# EAGLE board uAMP_v1.1 (EAGLE 4.16)
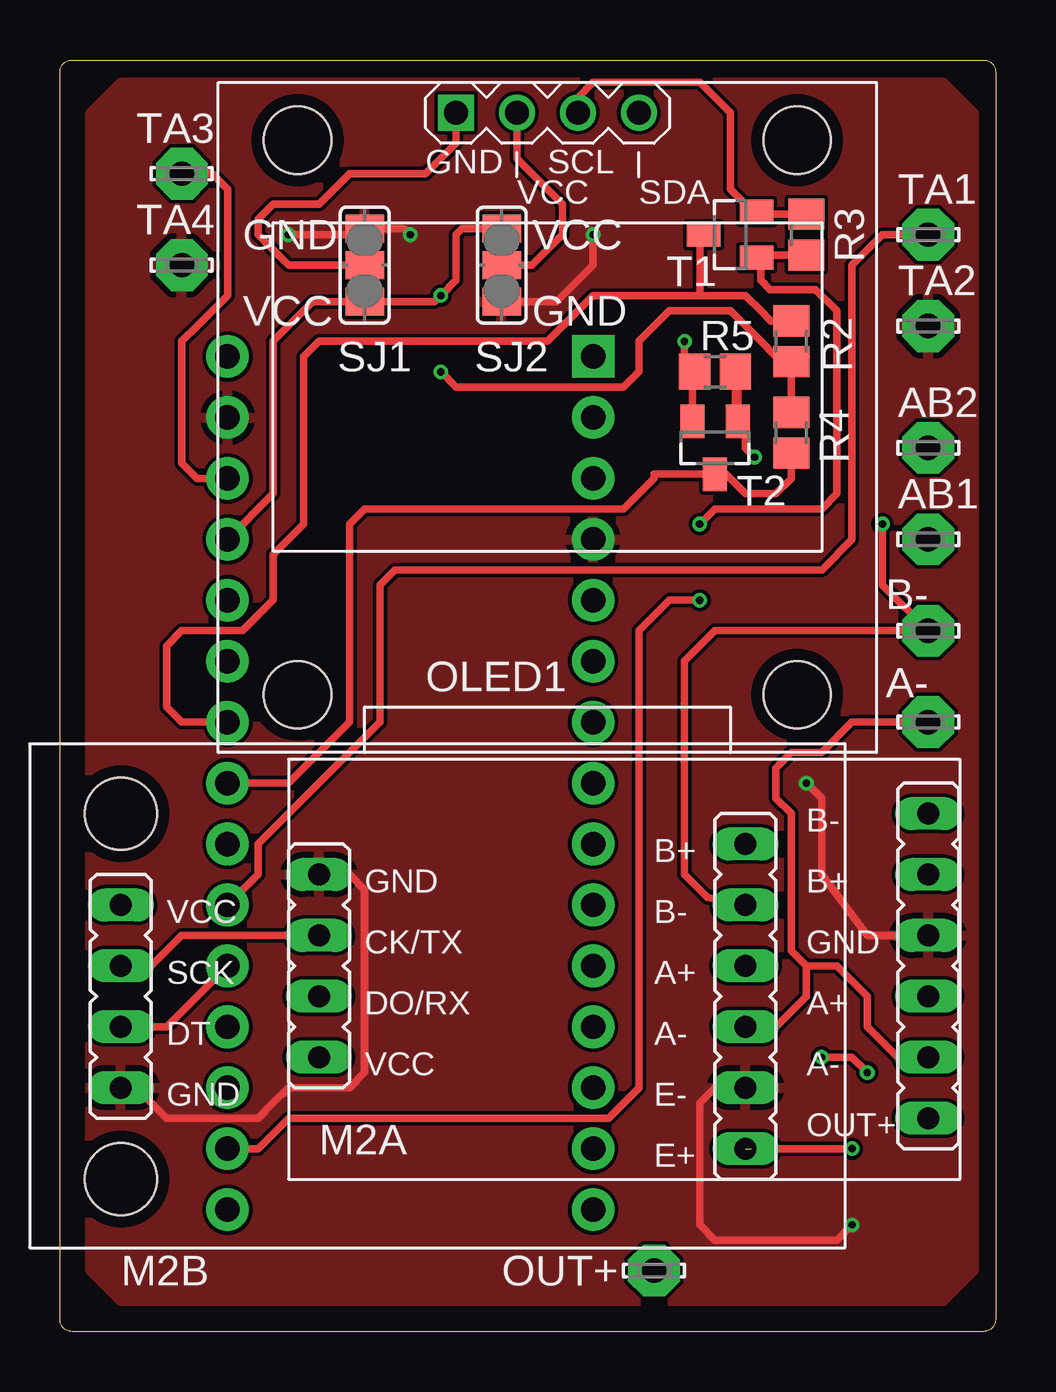
[diagram p0: board, top side]
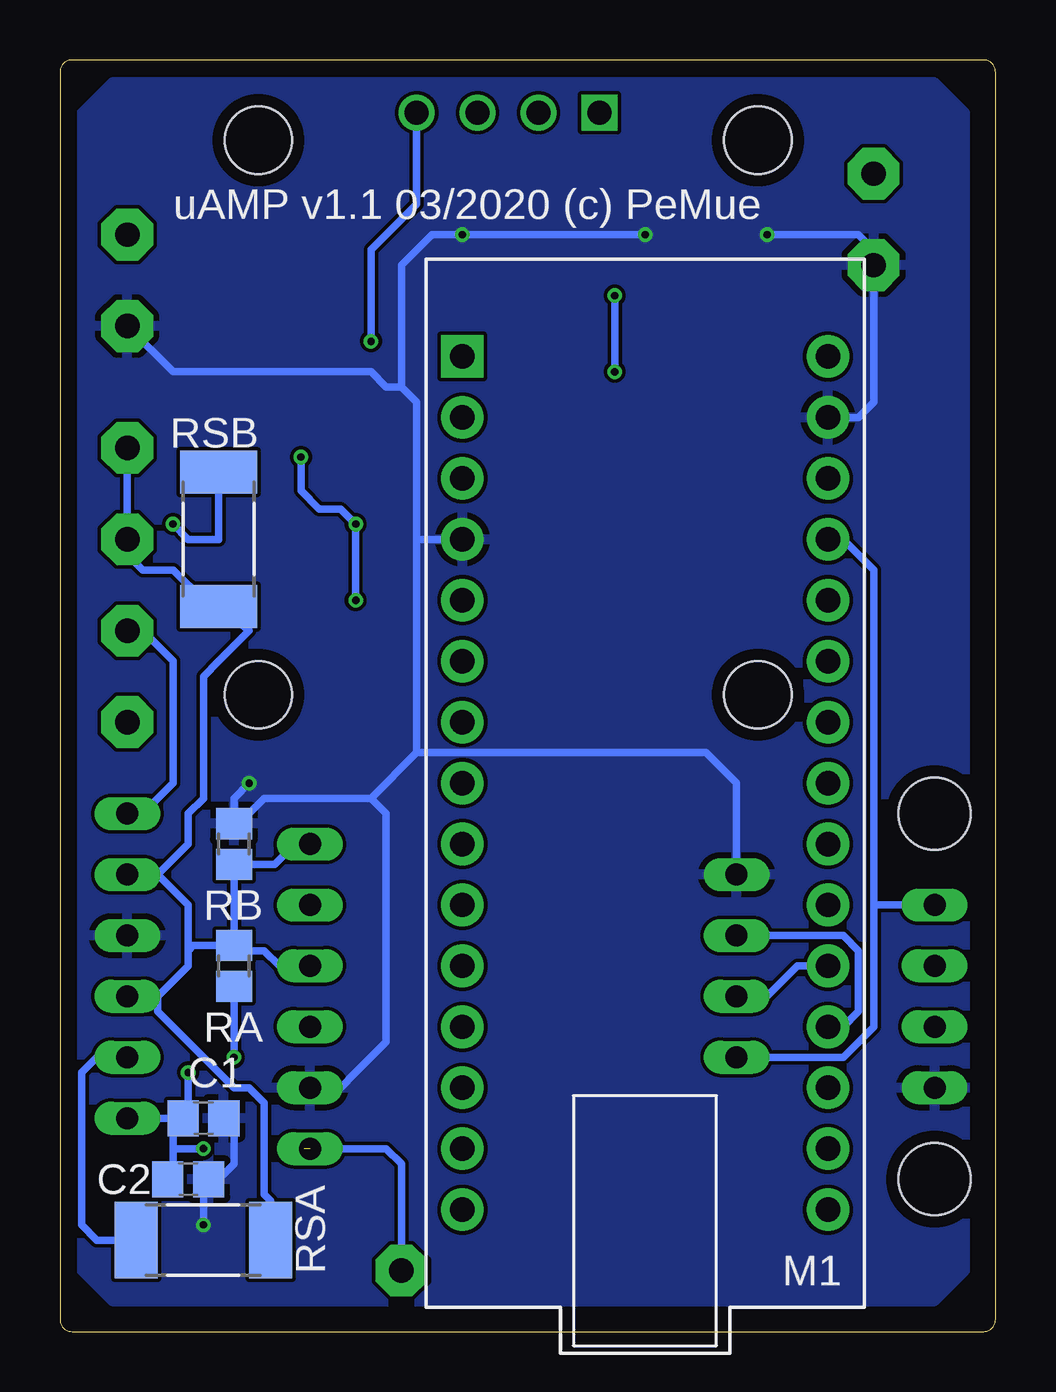
[diagram p1: board, bottom side, seen from below]

Size 39 x 53 mm. Coordinates in mm from the lower left corner, seen from the top.
Outline: 0,52.5 arc-90 0.5,53 38.5,53 arc-90 39,52.5 39,0.5 arc-90 38.5,0 0.5,0 arc-90 0,0.5 0,52.5
Copper layers (1*16): Top 0.035mm / dielectric 1.6mm / Bottom 0.035mm
Design rules "Elecrow_2-layer": minimum track width 6mil, minimum drill 12mil, track to track 6mil, track to pad 6mil, pad to pad 6mil, via to via 8mil, smd to smd 0mil, copper to edge 20mil, drill to drill 10mil, minimum pad ring 6mil, minimum via ring 6mil, stop-mask expansion 0mil, vias tented up to drill 100mil, thermal gap 10mil

## Footprints (pad centres in the part's own frame; a part is rotated, then mirrored left to right if it is on the bottom)
LSP10 = drill 1.016 pad 2.159 octagon: MP 0,0
C0805 = smd 1.3 x 1.5: 1 -0.85,0; 2 0.85,0
ARDUINO_NANO1 = drill 1.016 pad 1.778 round: 3V3 15.24,-35.56; +5V 15.24,-10.16; A0 15.24,-30.48; A1 15.24,-27.94; A2 15.24,-25.4; A3 15.24,-22.86; A4 15.24,-20.32; A5 15.24,-17.78; A6 15.24,-15.24; A7 15.24,-12.7; AREF 15.24,-33.02; D0/RX 0,-5.08; D2 0,-12.7; D3 0,-15.24; D4 0,-17.78; D5 0,-20.32; D6 0,-22.86; D7 0,-25.4; D8 0,-27.94; D9 0,-30.48; D10 0,-33.02; D11 0,-35.56; D12 0,-38.1; D13 15.24,-38.1; GND@0 0,-10.16; GND@1 15.24,-5.08; RESET@0 0,-7.62; RESET@1 15.24,-7.62; VIN 15.24,-2.54 | drill 1.016 pad 1.778 square: D1/TX 0,-2.54
HX711_RED = drill 0.914 long: A+ 26.67,7.62; A- 26.67,5.08; B+ 26.67,12.7; B- 26.67,15.24; CK/TX 1.27,10.16; DO/RX 1.27,7.62; GND@1 1.27,12.7; GND@2 26.67,10.16; OUT+ 26.67,2.54; VCC 1.27,5.08
HY711_GREEN = drill 0.914 long: A+ 29.845,11.43; A- 29.845,8.89; B+ 29.845,16.51; B- 29.845,13.97; DT 3.81,8.89; E+ 29.845,3.81; E- 29.845,6.35; GND 3.81,6.35; SCK 3.81,11.43; VCC 3.81,13.97 | hole 3: 3.81,17.78; 3.81,2.54
OLED_128X64_I2C = drill 1 square: 1 -3.81,12.7 | drill 1 round: 2 -1.27,12.7; 3 1.27,12.7; 4 3.81,12.7 | hole 2.8: -10.414,11.557; 10.414,11.557; 10.414,-11.557; -10.414,-11.557
R0805 = smd 1.3 x 1.5: 1 -0.85,0; 2 0.85,0
R2512 = smd 1.8 x 3.2: 1 -2.8,0; 2 2.8,0
SJ_2 = smd 1.168 x 1.6: 1 -1.524,0; 2 0,0; 3 1.524,0
SOT23 = smd 1 x 1.4: 1 -0.95,-1.1; 2 0.95,-1.1; 3 0,1.1

## Placement (x,y rotation side)
A-  LSP10  [LSP10]  36.2,25.4 0 top
AB1  LSP10  [LSP10]  36.2,33.02 0 top
AB2  LSP10  [LSP10]  36.2,36.83 0 top
B-  LSP10  [LSP10]  36.2,29.21 0 top
C1  100n  [C0805]  33.02,8.89 0 bottom
C2  10µ  [C0805]  33.66,6.35 0 bottom
M1  ARDUINO_NANO1  [ARDUINO_NANO1]  22.23,43.18 0 bottom
M2A  HX711_RED  [HX711_RED]  9.53,6.35 0 top
M2B  HX711_GREEN  [HY711_GREEN]  -1.27,3.81 0 top
OLED1  OLED_128X64_I2C  [OLED_128X64_I2C]  20.32,38.1 0 top
OUT+  LSP10  [LSP10]  24.77,2.54 0 top
R2  10k  [R0805]  30.48,41.27 270 top
R3  10k  [R0805]  31.11,45.72 270 top
R4  10k  [R0805]  30.48,37.47 90 top
R5  10k  [R0805]  27.3,40.01 0 top
RA  1k  [R0805]  31.75,15.24 270 bottom
RB  1k  [R0805]  31.75,20.32 270 bottom
RSA  1  [R2512]  33.02,3.81 180 bottom
RSB  1  [R2512]  32.38,33.02 90 bottom
SJ1  [SJ_2]  12.7,44.45 90 top
SJ2  [SJ_2]  18.41,44.45 90 top
T1  2N7002K  [SOT23]  27.94,45.72 90 top
T2  2N7002K  [SOT23]  27.3,36.83 180 top
TA1  LSP10  [LSP10]  36.2,45.72 0 top
TA2  LSP10  [LSP10]  36.2,41.91 0 top
TA3  LSP10  [LSP10]  5.08,48.26 0 top
TA4  LSP10  [LSP10]  5.08,44.45 0 top

## Library data of the parts
A- AB1 AB2 B- OUT+ TA1-TA4 = solpad
C1 C2 R2-R5 RA RB RSA RSB = rcl
M1 = arduino
M2A M2B = sensor
OLED1 = opto
SJ1 SJ2 = jumper
T1 T2 = electronics

## Nets
+3V3: M1.3V3 R3.2 R5.2 T1.1 T2.1
+5V: M1.+5V M2A.VCC M2B.VCC R2.2 R4.2 SJ1.1 SJ2.3
A-: A-.MP M2A.A- M2B.A- RSA.2
AB+: AB1.MP AB2.MP M2A.A+ M2A.B+ M2B.A+ M2B.B+ RA.1 RB.2 RSA.1 RSB.1
B-: B-.MP M2A.B- M2B.B- RSB.2
GND: C1.2 C2.2 M1.GND@0 M1.GND@1 M2A.GND@1 M2A.GND@2 M2B.E- M2B.GND RB.1 SJ1.3 SJ2.1 TA2.MP TA4.MP
N$1: M1.RESET@1 TA3.MP
N$3: M1.A1 M2A.DO/RX M2B.DT
N$4: M1.A0 M2A.CK/TX M2B.SCK
N$5: M1.A2 TA1.MP
OUT+: C1.1 C2.1 M2A.OUT+ M2B.E+ OUT+.MP RA.2
SCL_3: OLED1.3 R3.1 T1.2
SCL_5: M1.A5 R2.1 T1.3
SDA_3: OLED1.4 R5.1 T2.2
SDA_5: M1.A4 R4.1 T2.3
SUPPLY1: OLED1.1 SJ1.2
SUPPLY2: OLED1.2 SJ2.2

## Tracks (layer width: path | path; a pad name or v marks a point on that pad's centre or on a via)
+3V3  (via drill 0.3)
  Top 0.305: T2.1 28.25,39.69 27.94,40.01 R5.2 28.16,38.52 28.57,38.1 28.57,36.83 v28.96,36.45 | R3.2 29.43,44.87 29.21,45.09 29.04,44.91 T1.1 29.04,44.62 29.21,44.45 29.21,43.81 29.59,43.43 31.5,43.43 32.38,42.55 32.38,34.92 31.75,34.29 27.3,34.29 | 27.3,34.29 v26.67,33.66 27.3,34.29 | M1.3V3 8.26,7.62 9.53,8.89 22.86,8.89 24.13,10.16 24.13,29.21 25.4,30.48 v26.67,30.48
  Bottom 0.305: v26.67,30.48 v26.67,33.66 27.3,34.29 27.94,34.29 | v28.96,36.45 28.96,35.18 28.96,35.05 28.19,34.29 27.94,34.29 | 27.94,34.29 28.07,34.29
+5V  (via drill 0.3)
  Top 0.305: M1.+5V 8.89,34.92 8.89,41.27 10.54,42.93 SJ1.1 15.62,42.93 v15.88,43.18 | SJ2.3 16.76,45.97 16.51,45.72 16.51,43.81 | v15.88,43.18 16.51,43.81 | 30.48,38.1 R4.2 30.48,40.01 30.48,40.64 | 31.11,40.64 R2.2 30.48,40.64 | 30.48,40.64 29.84,40.64 29.21,41.27 27.94,42.55 25.4,42.55 24.13,41.27 24.13,40.01 23.5,39.37 16.51,39.37 v15.88,40.01 | v15.88,43.18 16.51,43.81
  Bottom 0.305: M2A.VCC 6.35,11.43 5.08,12.7 5.08,17.78 | 5.08,17.78 5.08,31.75 6.35,33.02 M1.+5V | v15.88,40.01 15.88,42.55 v15.88,43.18 | 5.08,17.78 M2B.VCC
A-
  Top 0.305: A-.MP 33.66,25.4 33.02,25.4 31.75,24.13 30.48,24.13 29.84,23.5 29.84,22.23 30.48,21.59 30.48,15.88 31.11,15.24 | 31.11,15.24 32.38,15.24 33.02,14.61 33.66,13.97 33.66,12.7 34.29,12.06 34.92,11.43 M2A.A- | M2B.A- 29.84,12.7 31.11,13.97 31.11,15.24
  Bottom 0.305: M2A.A- 37.47,11.43 38.1,10.79 38.1,4.45 37.47,3.81 35.56,3.81 RSA.2
AB+
  Bottom 0.305: 34.92,13.97 35.56,13.97 M2A.A+ | 33.66,15.88 33.66,15.24 34.92,13.97 | 33.66,15.88 33.66,17.78 34.92,19.05 | 34.92,19.05 M2A.B+ | 34.92,19.05 33.66,20.32 33.66,21.59 33.02,22.23 33.02,23.5 33.02,27.3 32.38,27.94 31.11,29.21 RSB.1 32.76,30.22 33.02,30.48 34.29,31.75 35.56,31.75 36.2,32.38 AB1.MP AB2.MP | RA.1 RB.2 30.06,19.47 29.84,19.68 29.21,20.32 M2B.B+ | RA.1 33.44,16.09 33.66,15.88 | M2B.A+ 29.84,15.24 30.48,15.88 31.75,15.88 RA.1 | RSA.1 30.22,5.46 30.48,5.71 30.48,6.35 30.48,6.99 30.48,7.62 30.48,9.53 31.11,10.16 31.75,10.16 34.92,13.34 34.92,13.97
B-  (via drill 0.3)
  Top 0.305: v34.29,33.66 34.29,31.11 B-.MP 35.56,29.21 34.92,29.21 33.66,29.21 27.3,29.21 26.04,27.94 26.04,19.05 26.99,18.1 M2B.B-
  Bottom 0.305: M2A.B- 35.56,21.59 34.29,22.86 34.29,27.94 35.56,29.21 B-.MP | v34.29,33.66 33.66,33.02 32.38,33.02 RSB.2 31.11,36.2
GND  (via drill 0.3)
  Top 0.305: v31.11,22.86 31.75,22.23 31.75,19.05 33.66,16.51 M2A.GND@2 | v9.53,45.72 12.06,45.72 SJ1.3 14.35,45.97 v14.61,45.72 | SJ2.1 20.7,42.93 22.23,44.45 v22.23,45.72 | M2B.GND 2.86,10.48 4.45,8.89 7.62,8.89 8.26,8.89 8.89,9.53 9.53,10.16 12.06,10.16 12.7,10.79 12.7,18.41 12.06,19.05 M2A.GND@1 | M2B.E- 27.3,10.16 26.67,9.53 26.67,4.45 27.3,3.81 32.38,3.81 v33.02,4.45
  Bottom 0.305: 31.54,21.17 30.48,22.23 27.3,22.23 26.04,22.23 | 31.54,21.17 RB.1 31.54,21.17 | 31.54,21.17 31.96,21.17 31.75,21.59 31.75,22.23 v31.11,22.86 | 24.77,39.37 25.4,39.37 26.04,40.01 34.29,40.01 TA2.MP | 24.77,39.37 24.13,38.73 24.13,34.29 24.13,33.66 24.13,33.02 | 24.13,33.02 M1.GND@0 24.13,33.02 | M1.GND@1 5.71,38.1 5.08,38.73 5.08,42.55 | TA4.MP 5.08,45.09 5.71,45.72 v9.53,45.72 | TA4.MP 5.08,42.55 | 24.13,24.13 24.13,31.75 24.13,33.02 | 24.77,39.37 24.77,44.45 23.5,45.72 | 23.5,45.72 v22.23,45.72 | v22.23,45.72 v14.61,45.72 | 23.5,45.72 v22.23,45.72 | TA4.MP 5.08,42.55 | 10.16,19.05 M2A.GND@1 10.79,22.86 12.06,24.13 24.13,24.13 | 24.13,24.13 26.04,22.23 | 26.67,10.79 27.3,10.16 | 27.3,10.16 M2B.E- 27.3,10.16 | 26.67,10.79 27.3,10.16 | 26.67,10.79 25.4,12.06 25.4,21.59 26.04,22.23 | C1.2 31.75,8.89 31.75,6.99 32.38,6.35 C2.2 33.02,6.35 v33.02,4.45
  pour Bottom: 2.54,52.07 36.83,52.07 38.1,50.8 38.1,2.54 36.83,1.27 2.54,1.27 1.27,2.54 1.27,50.8
  pour Top: 2.54,52.07 36.83,52.07 38.1,50.8 38.1,2.54 36.83,1.27 2.54,1.27 1.27,2.54 1.27,50.8
N$1
  Top 0.305: TA3.MP 6.35,48.26 6.99,47.62 6.99,43.18 5.71,41.91 5.08,41.27 5.08,36.2 5.71,35.56 M1.RESET@1
N$3
  Top 0.305: M2B.DT 4.45,12.7 M1.A1
  Bottom 0.305: M2A.DO/RX 9.53,13.97 8.26,15.24 M1.A1
N$4
  Top 0.305: M2B.SCK 3.81,15.24 5.08,16.51 M2A.CK/TX
  Bottom 0.305: M1.A0 6.35,12.7 5.71,13.34 5.71,15.88 6.35,16.51 M2A.CK/TX 11.43,16.51
N$5
  Top 0.305: M1.A2 8.26,19.05 8.26,20.32 13.34,25.4 13.34,31.11 13.97,31.75 31.75,31.75 33.02,33.02 33.02,44.45 34.29,45.72 TA1.MP
OUT+  (via drill 0.3)  (1 unrouted)
  Top 0.305: v31.75,11.43 33.02,11.43 v33.66,10.79 | v33.02,7.62 28.83,7.62 28.89,7.56
  Bottom 0.305: 31.75,13.97 RA.2 31.75,14.61 v31.75,11.43 | OUT+.MP 24.77,6.99 25.4,7.62 27.94,7.62 M2B.E+ | C1.1 33.87,8.68 34.29,8.26 34.29,7.62 | 34.29,7.62 34.29,6.99 34.29,6.35 C2.1 | C1.1 35.56,8.89 M2A.OUT+ | C1.1 33.66,8.89 v33.66,10.79 | v33.02,7.62 34.29,7.62
SCL_3
  Top 0.305: OLED1.3 21.59,51.44 22.23,52.07 26.67,52.07 27.94,50.8 27.94,47.62 28.89,46.67 T1.2 29.04,46.52 29.21,46.35 29.43,46.57 R3.1
SCL_5
  Top 0.305: M1.A5 5.08,25.4 4.45,26.04 4.45,28.57 5.08,29.21 7.62,29.21 8.89,30.48 8.89,32.38 10.16,33.66 10.16,40.64 10.79,41.27 20.32,41.27 20.95,41.91 22.23,43.18 26.67,43.18 | T1.3 26.67,45.72 26.67,43.18 | R2.1 29.63,42.12 29.21,42.55 28.57,43.18 26.67,43.18
SDA_3  (via drill 0.3)
  Top 0.305: T2.2 26.36,39.69 26.04,40.01 R5.1 26.67,40.01 26.04,40.64 v26.04,41.27
  Bottom 0.305: OLED1.4 24.13,46.99 25.4,45.72 26.04,45.09 v26.04,41.27
SDA_5
  Top 0.305: M1.A4 9.53,22.86 12.06,25.4 12.06,33.66 12.7,34.29 23.5,34.29 24.77,35.56 24.77,35.73 T2.3 27.77,35.73 28.57,34.92 29.84,34.92 30.48,35.56 30.48,36.2 R4.1
SUPPLY1
  Top 0.305: SJ1.2 9.53,44.45 8.26,45.72 8.26,46.35 8.89,46.99 10.79,46.99 12.06,48.26 15.24,48.26 16.51,49.53 OLED1.1
SUPPLY2
  Top 0.305: OLED1.2 19.05,48.9 20.95,46.99 20.95,45.72 19.68,44.45 SJ2.2

## Text on the board
tPlace: GND | VCC | VCC | GND
bPlace: uAMP v1.1 03/2020 (c) PeMue